# EAGLE board arduino_Uno_Rev3-02-TH (EAGLE 7.5.0)
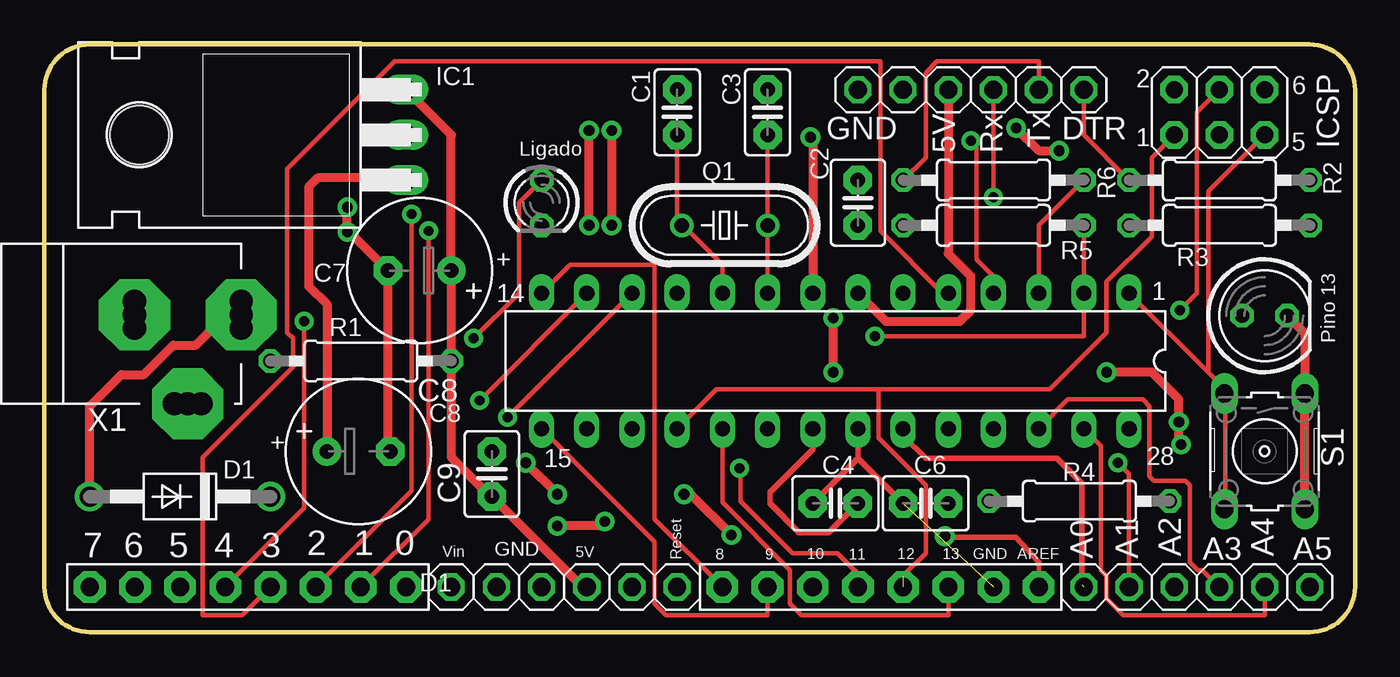
[diagram p0: board, top side]
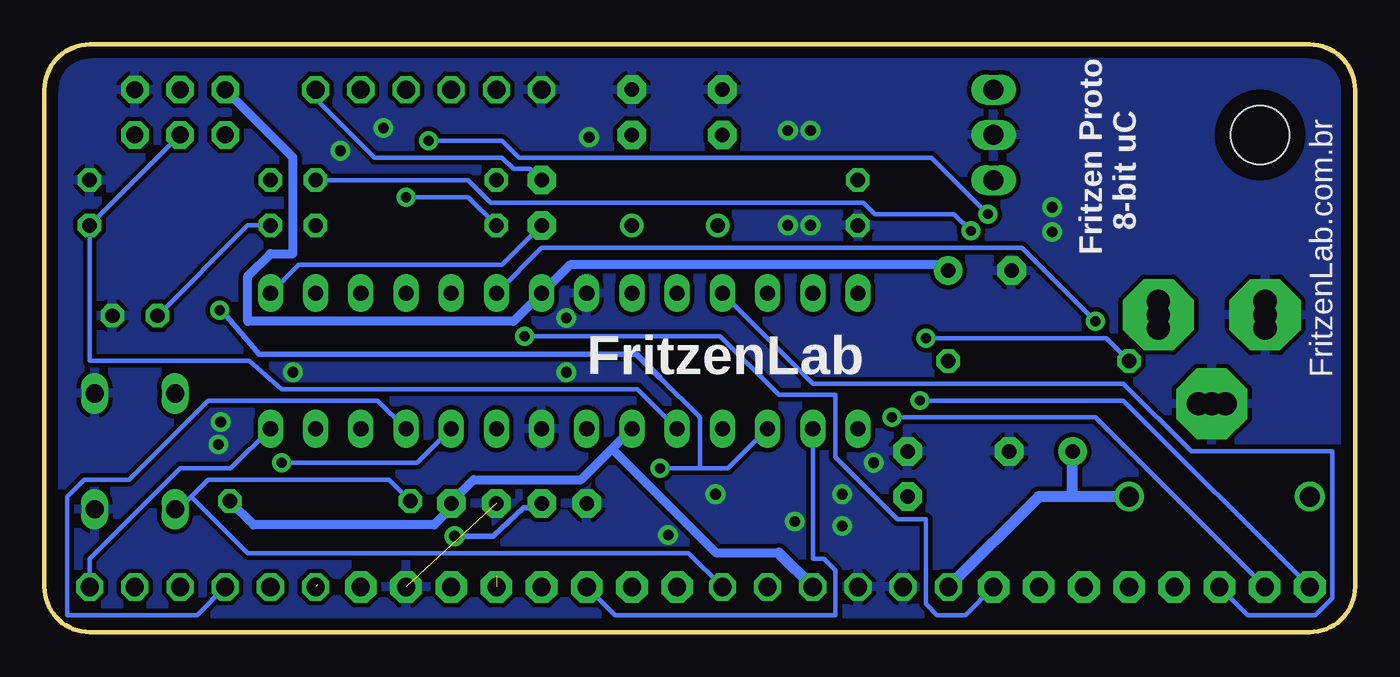
[diagram p1: board, bottom side, seen from below]

Size 73.66 x 33.02 mm. Coordinates in mm from the lower left corner, seen from the top.
Outline: 0,2.54 0,30.48 arc-90 2.54,33.02 71.12,33.02 arc-90 73.66,30.48 73.66,2.54 arc-90 71.12,0 2.54,0 arc-90 0,2.54
Copper layers (1*16): Top 0.035mm / dielectric 1.5mm / Bottom 0.035mm
Design rules "default *": minimum track width 10mil, minimum drill 22mil, track to track 10mil, track to pad 10mil, pad to pad 10mil, via to via 10mil, smd to smd 8mil, copper to edge 26mil, drill to drill 10mil, minimum pad ring 10mil, minimum via ring 10mil, stop-mask expansion 1mil, vias tented up to drill 30mil, thermal gap 10mil
Net classes: 0 default: width 0.254 mm, clearance 0.254 mm; 1 power: width 0.61 mm, drill 0.61 mm, clearance 0.254 mm; 2 gnd: width 0.305 mm, drill 0.559 mm, clearance 0.254 mm; 3 usbvcc: width 0.508 mm, drill 0.61 mm, clearance 0.254 mm; 4 aref: width 0.406 mm, drill 0.61 mm, clearance 0.254 mm
vRestrict: area 47.9,10.3 to 48.5,10.8; area 50.4,10.2 to 50.9,11

## Footprints (pad centres in the part's own frame; a part is rotated, then mirrored left to right if it is on the bottom)
C2.5-2 = drill 0.813 pad 1.6 octagon: 1 -1.27,0; 2 1.27,0
C2.5-3 = drill 0.813 pad 1.6 octagon: 1 -1.27,0; 2 1.27,0
E3,5-8 = drill 0.813 pad 1.6: + -1.778,0 | drill 0.813 pad 1.6 octagon: - 1.778,0
DO41-10 = drill 1.118: A 5.08,0; C -5.08,0
TO220H = drill 1.118 long: 1 -2.54,-10.16; 2 0,-10.16; 3 2.54,-10.16 | hole 3.302: 0,4.826
2X03 = drill 0.95 pad 1.55 octagon: 1 -2.54,-1.27; 2 -2.54,1.27; 3 0,-1.27; 4 0,1.27; 5 2.54,-1.27; 6 2.54,1.27
1X06 = drill 1.016 octagon: 1 -6.35,0; 2 -3.81,0; 3 -1.27,0; 4 1.27,0; 5 3.81,0; 6 6.35,0
1X08-BIG = drill 1.016 pad 1.778 octagon: 1 -8.89,0; 2 -6.35,0; 3 -3.81,0; 4 -1.27,0; 5 1.27,0; 6 3.81,0; 7 6.35,0; 8 8.89,0
LED3MM = drill 0.813 octagon: A -1.27,0; K 1.27,0
LED5MM = drill 0.813 octagon: A -1.27,0; K 1.27,0
DIL28-3 = drill 0.85 pad 1.422 long: 1 -16.51,-3.81; 2 -13.97,-3.81; 3 -11.43,-3.81; 4 -8.89,-3.81; 5 -6.35,-3.81; 6 -3.81,-3.81; 7 -1.27,-3.81; 8 1.27,-3.81; 9 3.81,-3.81; 10 6.35,-3.81; 11 8.89,-3.81; 12 11.43,-3.81; 13 13.97,-3.81; 14 16.51,-3.81; 15 16.51,3.81; 16 13.97,3.81; 17 11.43,3.81; 18 8.89,3.81; 19 6.35,3.81; 20 3.81,3.81; 21 1.27,3.81; 22 -1.27,3.81; 23 -3.81,3.81; 24 -6.35,3.81; 25 -8.89,3.81; 26 -11.43,3.81; 27 -13.97,3.81; 28 -16.51,3.81
HC49/S = drill 0.813: 1 -2.413,0; 2 2.413,0
0207/10 = drill 0.813 octagon: 1 -5.08,0; 2 5.08,0
B3F-10XX = drill 1.016 long: 1 -3.251,2.261; 2 3.251,2.261; 3 -3.251,-2.261; 4 3.251,-2.261
POWERSUPPLY_DC-21MM = drill 1.3 pad 4 octagon: 1 -5.08,-3.353; 2 -0.076,-6.35; 3 -0.076,-0.356 | drill 1.3: 4 -5.08,-4.115; 5 -5.08,-2.591; 6 -0.838,-0.356; 7 0.686,-0.356; 8 -0.838,-6.35; 9 0.686,-6.35

## Placement (x,y rotation side)
C1  22pF  [C2.5-2]  35.56,29.21 270 top
C2  100nF  [C2.5-3]  45.72,24.13 90 top
C3  22pF  [C2.5-2]  40.64,29.21 270 top
C4  100nF  [C2.5-3]  44.45,7.24 0 top
C6  100nF  [C2.5-3]  49.53,7.24 180 top
C7  47uF  [E3,5-8]  21.08,20.32 180 top
C8  47uF  [E3,5-8]  17.65,10.16 0 top
C9  100nF  [C2.5-3]  25.15,8.89 90 top
D1  1N4004  [DO41-10]  7.62,7.62 180 top
IC1  7805T  [TO220H]  10.16,27.94 90 top
ICSP  3x2 M  [2X03]  66.04,29.21 0 top
JP1  [1X06]  64.77,2.54 180 top
JP2  [1X08-BIG]  11.43,2.54 0 top
JP3  [1X06]  29.21,2.54 180 top
JP4  [1X08-BIG]  46.99,2.54 180 top
JP5  [1X06]  52.07,30.48 180 top
LED1  PWR_LED  [LED3MM]  27.94,24.13 270 top
LED2  PIN13  [LED5MM]  68.58,17.78 0 top
MCU  ATMEGA328P-PU  [DIL28-3]  44.45,15.24 180 top
Q1  16MHz  [HC49/S]  38.23,22.86 180 top
R1  1k  [0207/10]  17.78,15.24 180 top
R2  1k  [0207/10]  66.04,25.4 180 top
R3  1k  [0207/10]  66.04,22.86 180 top
R4  1k  [0207/10]  58.17,7.37 0 top
R5  1k  [0207/10]  53.34,22.86 180 top
R6  1k  [0207/10]  53.34,25.4 180 top
S1  Reset  [B3F-10XX]  68.58,10.16 270 top
X1  POWERSUPPLY_DC21MMX  [POWERSUPPLY_DC-21MM]  4.7,17.91 90 top

## Library data of the parts
C1-C4 C6 C9 = capacitor-wima
C7 C8 R1-R6 = rcl
D1 = diode
IC1 = linear
ICSP MCU X1 = SmartPrj
JP1-JP5 = adafruit
LED1 LED2 = led
Q1 = crystal; OC_FARNELL: 1667008; OC_NEWARK: unknown
S1 = switch-omron; MPN: B3F-1000; OC_FARNELL: 176432; OC_NEWARK: 36M3542

## Nets
+5V [usbvcc]: C6.1 C7.+ C9.1 IC1.3 ICSP.2 JP3.3 JP5.4 MCU.7 MCU.20 R1.1 R4.2
AD0: JP1.6 MCU.23
AD1: JP1.5 MCU.24
AD2: JP1.4 MCU.25
AD3: JP1.3 MCU.26
AD4/SDA: JP1.2 MCU.27
AD5/SCL: JP1.1 MCU.28
AREF [aref]: C4.2 JP4.1 MCU.21
DTR: C2.2 JP5.1 R2.2
GND [gnd]: C1.1 C3.1 C4.1 C6.2 C7.- C8.- C9.2 IC1.2 ICSP.6 JP3.4 JP3.5 JP4.2 JP5.6 LED1.K LED2.K MCU.8 MCU.22 R2.1 S1.1 S1.2 X1.1 X1.3
IO0: JP2.8 MCU.2 R5.1
IO1: JP2.7 MCU.3 R6.1
IO2: JP2.6 MCU.4
IO3: JP2.5 MCU.5
IO4: JP2.4 MCU.6
IO5: JP2.3 MCU.11
IO6: JP2.2 MCU.12
IO7: JP2.1 MCU.13
IO8: JP4.8 MCU.14
IO9: JP4.7 MCU.15
M8RXD: JP5.3 R5.2
M8TXD: JP5.2 R6.2
MISO: ICSP.1 JP4.4 MCU.18
MOSI: ICSP.4 JP4.5 MCU.17
N$1: JP3.2
N$2: LED2.A R3.2
N$3: LED1.A R1.2
N$8: JP5.5
PWRIN [power]: D1.A X1.2
RESET: C2.1 ICSP.5 JP3.1 MCU.1 R4.1 S1.3 S1.4
SCK: ICSP.3 JP4.3 MCU.19 R3.1
SS: JP4.6 MCU.16
VIN [power]: C8.+ D1.C IC1.1 JP3.6
XTAL1: C3.2 MCU.9 Q1.1
XTAL2: C1.2 MCU.10 Q1.2

## Tracks (layer width: path | path; a pad name or v marks a point on that pad's centre or on a via)
+5V
  Top 0.508: 25.4,7.62 C9.1 | MCU.7 47.31,17.46 51.44,17.46 52.07,18.1 52.07,20 50.9,21.18 50.8,21.27 JP5.4 | IC1.3 22.86,27.94 C7.+ R1.1 22.86,9.84 25.08,7.62 C9.1 | JP3.3 30.23,2.54 C9.1
  Bottom 0.508: R4.2 61.91,6.03 51.75,6.03 50.8,6.99 C6.1 50.8,7.3 49.53,8.57 43.5,8.57 41.75,10.32 | 41.75,10.32 MCU.20 | C7.+ 23.18,20.64 44.13,20.64 MCU.7 47.31,17.46 62.23,17.46 62.23,20 60.96,21.27 59.69,21.27 59.69,26.67 ICSP.2 | 41.75,10.32 35.88,4.45 32.38,4.45
  Bottom 0.61: JP3.3 32.38,4.45
AD0  (1 unrouted)
  Top 0.305: 58.29,2.67 58.29,8.38 56.9,9.78 49.53,9.78 48.26,11.05 MCU.23
AD1  (via drill 0.56)
  Top 0.254: v60.33,9.53 60.96,8.89 JP1.5
  Bottom 0.254: MCU.24 52.7,9.53 v60.33,9.53
AD2
  Bottom 0.254: MCU.25 54.93,13.02 64.45,13.02 68.9,8.57 71.44,8.57 72.39,7.62 72.39,0.95 65.09,0.95 JP1.4
AD3
  Top 0.254: MCU.26 57.53,13.08 61.72,13.08 62.1,12.7 62.1,8.76 62.36,8.51 64.14,8.51 64.39,8.26 64.39,3.94 64.83,3.49 65.09,3.49 JP1.3
AD4/SDA
  Top 0.254: MCU.27 59.37,10.48 59.37,3.49 59.69,3.17 59.69,1.91 60.64,0.95 68.58,0.95 JP1.2
AD5/SCL
  Bottom 0.254: MCU.28 63.18,9.21 66.04,9.21 71.12,4.13 JP1.1
AREF  (via drill 0.61)
  Top 0.254: JP4.1 55.88,3.97 55.59,4.25
  Top 0.305: C4.2 44.07,5.59 42.42,5.59 40.77,7.24 40.77,7.87 43.18,10.29 MCU.21 | v50.61,5.4 50.93,5.33 54.61,5.33 55.59,4.25 55.88,3.94
  Bottom 0.305: 46.35,6.99 46.74,6.99 48.45,5.4 v50.61,5.4
  Bottom 0.406: 46.35,6.99 45.72,6.99 C4.2
DTR
  Top 0.254: R2.2 58.42,27.94 JP5.1
  Bottom 0.254: C2.2 46.35,26.04 47.31,26.04 47.94,26.67 55.12,26.67 58.42,29.97 JP5.1
GND  (via drill 0.6)  (1 unrouted)
  Top 0.305: C4.1 45.72,9.78 | C6.2 45.72,9.78 | 45.72,9.78 MCU.22
  Top 0.508: v43.05,27.81 43.18,27.69 MCU.8 | LED2.K 70.84,16.79 S1.1 S1.2 | C8.- 19.3,10.29 C7.- 17.02,22.61 v17.02,23.88 | v30.61,22.86 v30.61,28.19 | v31.88,28.19 31.88,22.73 | v27.05,9.53 v28.83,7.75 | v44.32,17.65 v44.32,14.61 | v54.61,28.32 55.88,27.05 v57.02,27.05 | v63.88,10.54 63.75,10.67 63.75,13.08 62.23,14.61 59.82,14.61 | v38.61,5.46 36.32,7.75 v35.94,7.75 | v31.5,6.22 31.24,5.97 v28.83,5.97
  other vias: 17.02,22.48 31.88,22.86 59.69,14.61 63.75,11.81
  pour Bottom: 72.9,0.51 0.51,0.51 0.51,32.38 72.77,32.26
IO0  (via drill 0.56)
  Top 0.254: R5.1 MCU.2 58.42,16.64 v46.67,16.64
  Bottom 0.254: v46.67,16.64 35.69,16.64 32.38,13.34 29.21,13.34 29.21,9.84 25.72,6.35 24.13,6.35 24.13,1.59 23.5,0.95 21.91,0.95 JP2.8
IO1  (via drill 0.56)
  Top 0.254: R6.1 55.88,22.86 MCU.3 | v21.59,22.54 21.59,6.35 JP2.7
  Bottom 0.254: v21.59,22.54 22.54,23.5 26.99,23.5 27.62,24.13 48.58,24.13 49.85,25.4 R6.1
IO2  (via drill 0.56)
  Top 0.254: v20.64,23.5 20.64,7.94 JP2.6 | v52.07,27.62 52.39,27.3 52.39,20.95 53.34,20 MCU.4
  Bottom 0.254: v20.64,23.5 23.81,26.67 46.99,26.67 47.94,27.62 v52.07,27.62
IO3
  Top 0.254: MCU.5 50.48,19.05 46.99,22.54 46.99,32.07 19.68,32.07 13.65,26.04 13.65,16.83 13.97,16.51 13.97,14.92 8.89,9.84 8.89,0.95 11.11,0.95 JP2.5
IO4  (via drill 0.56)
  Top 0.254: v14.61,17.46 14.61,6.99 JP2.4
  Bottom 0.254: v14.61,17.46 18.73,21.59 45.72,21.59 MCU.6
IO5
  Bottom 0.254: MCU.11 30.48,13.97 13.02,13.97 9.21,10.16 1.27,10.16 1.27,1.91 2.22,0.95 6.03,0.95 JP2.3
IO6  (via drill 0.56)
  Top 0.254: MCU.12 v26.04,12.06
  Bottom 0.254: v26.04,12.06 14.61,12.06 JP2.2
IO7  (via drill 0.56)
  Top 0.254: MCU.13 v24.45,13.02
  Bottom 0.254: v24.45,13.02 13.02,13.02 JP2.1
IO8
  Top 0.254: MCU.14 29.53,20.64 34.29,20.64 34.29,6.35 JP4.8
IO9
  Top 0.254: MCU.15 34.29,5.08 34.29,1.59 34.92,0.95 40.51,0.95 | 40.64,0.95 40.51,0.95 | JP4.7 40.64,1.08 40.51,0.95
M8RXD  (via drill 0.56)
  Top 0.254: JP5.3 v53.34,24.45
  Bottom 0.254: R5.2 49.85,24.45 v53.34,24.45
M8TXD
  Top 0.254: R6.2 49.53,26.67 49.53,31.43 50.16,32.07 55.88,32.07 JP5.2
MISO  (1 unrouted)
  Top 0.254: MCU.18 37.78,13.65 46.86,13.65 | ICSP.1 62.23,26.67 62.23,22.23 59.69,19.68 59.69,16.83 56.52,13.65 46.86,13.65 | 48.26,3.17 49.53,4.45 49.53,8.26 46.86,10.92 46.86,13.65
MOSI  (via drill 0.56)
  Top 0.254: ICSP.4 64.77,29.21 64.77,19.05 v63.82,18.1 | v39.05,9.21 39.12,9.14 39.12,7.37 42.04,4.45 44.58,4.45 45.34,3.68 45.72,3.3 JP4.5
  Bottom 0.254: MCU.17 35.24,9.21 36.83,9.21 | v39.05,9.21 36.83,9.21 | 39.05,14.29 36.83,12.06 36.83,9.21
  Bottom 0.305: 39.05,14.29 40.39,15.62 61.59,15.62 63.69,18.1 v63.82,18.1
N$2
  Bottom 0.254: LED2.A 62.23,22.86 R3.2
N$3  (via drill 0.56)
  Top 0.254: v24.13,16.51 26.67,19.05 26.67,24.13 LED1.A
  Bottom 0.254: R1.2 13.97,16.51 v24.13,16.51
PWRIN
  Top 0.508: D1.A 2.54,12.7 4.32,14.48 5.59,14.48 7.24,16.13 8.51,16.13 10.21,17.83 X1.2
RESET
  Top 0.254: 65.41,14.61 66.04,13.97 66.04,13.65 S1.3 66.36,13.34 66.36,6.99 S1.4 | 65.41,14.61 MCU.1 | ICSP.5 65.41,24.77 65.41,14.61
  Bottom 0.254: R4.1 54.29,8.57 64.45,8.57 65.41,7.62 | 65.41,7.62 66.04,6.99 S1.4 | 65.41,7.62 62.23,4.45 37.47,4.45 JP3.1 | C2.1 47.94,20.64 59.37,20.64 MCU.1
SCK
  Top 0.254: MCU.19 38.1,7.3 41.91,3.49 41.91,1.59 42.55,0.95 50.8,0.95 JP4.3
  Bottom 0.254: ICSP.3 R3.1 71.12,15.24 62.17,15.24 60.33,13.65 40.32,13.65 MCU.19
SS
  Bottom 0.254: MCU.16 30.48,4.13 29.84,4.13 29.21,3.49 29.21,0.95 41.59,0.95 JP4.6
VIN
  Top 0.508: IC1.1 20.19,25.53 15.37,25.53 14.86,25.02 14.86,19.43 15.88,18.41 C8.+
  Bottom 0.61: 15.88,7.62 D1.C 15.88,7.62 | 15.88,7.62 17.78,7.62 JP3.6 | 15.88,7.62 C8.+
XTAL1
  Top 0.254: MCU.9 Q1.1 C3.2
XTAL2
  Top 0.254: MCU.10 38.1,20.64 35.88,22.86 Q1.2 35.56,22.86 C1.2

## Text on the board
tPlace: IC1 | 2 | ICSP | C1 | C3 | 6 | Tx | DTR | Ligado | GND | 5V | Rx | 1 | 5 | R6 | R2 | Q1 | C2 | R5 | R3 | C7 | + | Pino 13 | 14 | 1 | R1 | C8 | X1 | + | C6 | R4 | 28 | D1 | 15 | C4 | A0 | A1 | A2 | A4 | Vin | GND | 10 | 12 | 13 | GND | AREF | A3 | A5 | 7 | 6 | 5 | 4 | 3 | 2 | 1 | 0 | 5V | Reset | 8 | 9 | 11 | D1
bPlace: Fritzen Proto | FritzenLab.com.br | 8-bit uC | FritzenLab
214bmp: D:/SmartProjects/Snc/a4_bn_logo2.bmp